# Altium PCB TINY1616_PCB.PcbDoc
Units mil, origin at the board's own origin, x right, y up, seen from the top; angles counter-clockwise.
Board outline 640 x 1130 mil, 2 copper layers (Top Layer, Bottom Layer); 15 components, 24 nets, 74 pads, 7 vias.
Unrouted connection lines stored in the file: 4.
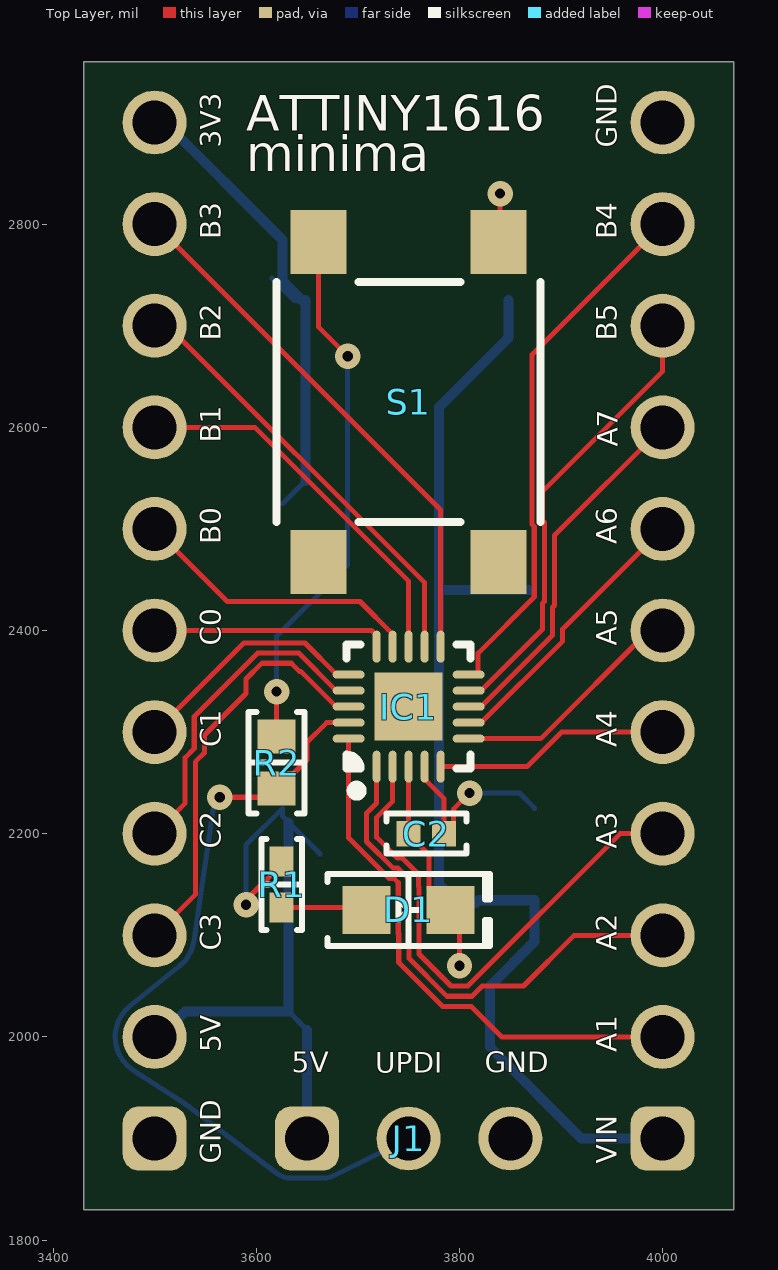
[diagram p0: Top Layer view]
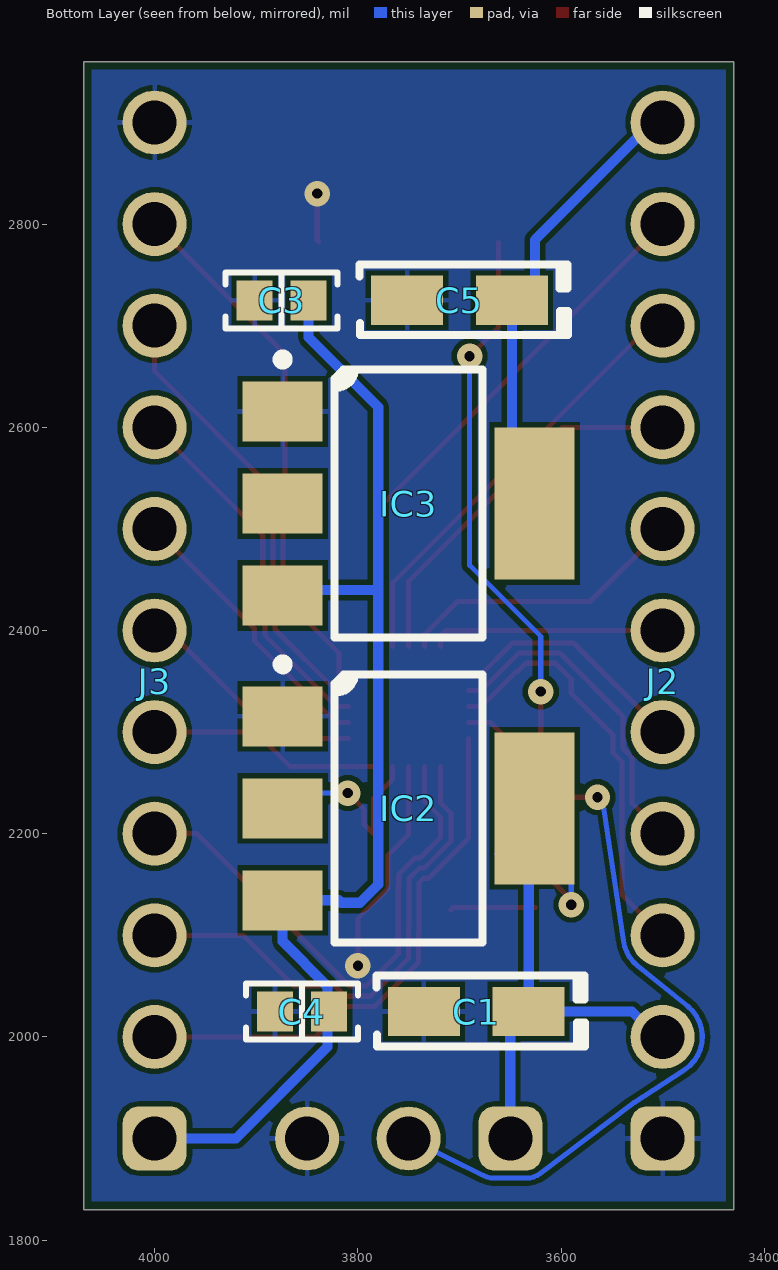
[diagram p1: Bottom Layer view, seen from below]

## Layer stack, top to bottom
Top Solder: solder mask 0.4, Solder Resist, Dk 3.5
Top Layer: signal copper 1.4
Dielectric 1: dielectric 12.6, FR-4, Dk 4.8
Bottom Layer: signal copper 1.4
Bottom Solder: solder mask 0.4, Solder Resist, Dk 3.5

## Board outline
3430,2960 3430,1830 4070,1830 4070,2960

## Design rules (kind name [scope] priority, off if disabled: settings)
BoardOutlineClearance [All] p1: gap=7.87 ignorepadtopadclearanceinfootprint=FALSE
Clearance [All] p1: gap=5 ignorepadtopadclearanceinfootprint=FALSE except(9.84: Arc-Hole Track-Hole SMDPad-Hole THPad-Hole Via-Hole Fill-Hole Poly-Hole Region-Hole Text-Hole)
ComponentClearance [All] p1: gap=5 collisioncheckmode=3 verticalgap=5 showdistances=TRUE
DiffPairsRouting [All] p1: maxlimit=10 minlimit=5 mostfreqgap=5 toplayer_minwidth=5 toplayer_maxwidth=1000 toplayer_prefwidth=5 bottomlayer_minwidth=5 bottomlayer_maxwidth=1000 bottomlayer_prefwidth=5 maxuncoupledlength=500
Height [All] p1: minheight=0 maxheight=71497.94 prefheight=500
HoleSize [All] p1: absolutevalues=TRUE maxlimit=248.03 minlimit=11.81 maxpercent=80.000 minpercent=20.000
HoleToHoleClearance [All] p1: gap=9.84 allowstackedmicrovias=FALSE
MinimumAnnularRing [All] p1: minimumring=3
MinimumSolderMaskSliver [All] p1: minsoldermaskwidth=0
PlaneClearance [All] p1: clearance=5
PlaneConnect PlaneConnectPowerPads [InPadClass('PowerPads')] p1: planeconnectstyle=Direct reliefexpansion=20 reliefentries=4 reliefconductorwidth=10 reliefairgap=10
PlaneConnect [All] p2: pad.planeconnectstyle=Relief pad.reliefexpansion=11.81 pad.reliefentries=4 pad.reliefconductorwidth=5 pad.reliefairgap=5 via.planeconnectstyle=Direct via.reliefexpansion=11.81 via.reliefentries=4 via.reliefconductorwidth=5 via.reliefairgap=5
PolygonConnect PolygonConnectPowerPads [All vs (InPadClass('PowerPads'))] p1: connectstyle=Direct reliefconductorwidth=10 reliefentries=4 polygonreliefangle="90 Angle" airgapwidth=10
PolygonConnect [All] p2: thpad.connectstyle=Relief thpad.reliefconductorwidth=5 thpad.reliefentries=4 thpad.polygonreliefangle="90 Angle" thpad.airgapwidth=5 smdpad.connectstyle=Relief smdpad.reliefconductorwidth=5 smdpad.reliefentries=4 smdpad.polygonreliefangle="90 Angle" smdpad.airgapwidth=5 via.connectstyle=Direct via.reliefconductorwidth=5 via.reliefentries=4 via.polygonreliefangle="90 Angle" via.airgapwidth=5
RoutingVias [All] p1: holewidth=11.81 width=23.62 viastyle="Through Hole" minholewidth=11.81 minwidth=23.62 maxholewidth=23.62 maxwidth=259.84
SilkToSilkClearance [All] p1: silktosilkclearance=0
SilkToSolderMaskClearance [IsPad] p1: minsilkscreentomaskgap=5 clearancetoexposedcopper=TRUE
SolderMaskExpansion [All] p1: expansion=2.95 istentingtop=FALSE
SupplyNets "Schematic Supply Nets" [InNet('GND')] p1: voltage=0.000
Width [All] p1: maxlimit=1000 minlimit=5 preferedwidth=5 minimp=50.000000 maximp=50.000000 favimp=50.000000
20 further rules are at their usual default settings.

## Components (designator, comment, footprint, x,y, rotation, side; value= is the part's Value field where it differs from the comment)
C1 "22 µF" "CAP POL 1206_3216" 3683.43,2025 r0 bottom
C2 "0.022 µF" "CAP 0402_1005" 3767.32,2200 r0 top
C3 "0.1 µF" "CAP 0603_1608" 3875,2725 r180 bottom
C4 "0.1 µF" "CAP 0603_1608" 3855,2025 r180 bottom
C5 "22 µF" "CAP POL 1206_3216" 3700,2725 r0 bottom
D1 "PWR" "LED 0805_2012 GREEN" 3750,2125 r0 top value=Green
IC1 "ATTINY1616-MNR" "MICROCHIP VQFN-20 3X3 REB" 3750,2325 r90 top
IC2 "LD1117S50TR" "ST SOT-223" 3750,2225 r180 bottom
IC3 "LD1117S33TR" "ST SOT-223" 3750,2525 r180 bottom
J1 "UPDI" "WURTH WE-PHD 61300311121" 3750,1900 r0 top
J2 "61301011121" "WURTH WE-PHD 61301011121" 3500,2350 r90 bottom
J3 "61301011121" "WURTH WE-PHD 61301011121" 4000,2350 r90 bottom
R1 "1k" "RES 0402_1005" 3625,2150 r90 top
R2 "180 Ohms" "RES 0603_1608" 3620,2270 r270 top
S1 "B3FS-1012P" "OMRON B3FS-1012P" 3750,2625 r270 top

## Footprints (in the part's own frame and the unit in brackets; to place one, negate y for a bottom-side part, rotate by r counter-clockwise, add the part's x,y. Pads: shape width x height; smd on the part's side, far side on the other; paste and mask are expansions set on the pad)
"CAP 0402_1005" [mm] "Chip Capacitor, 2-Leads, Body 1.02x0.51mm, IPC Medium Density"
  rect 0.6x0.64 smd: 1(-0.44,0) 2(0.44,0)
  silkscreen extent -1,-0.5 1,0.5, body extent -0.5,-0.26 0.5,0.26, height 0.52
"CAP 0603_1608" [mm] "Chip Capacitor, 2-Leads, Body 1.60x0.80mm, IPC Medium Density"
  rect 0.9x1 smd: 1(-0.675,0) 2(0.675,0)
  silkscreen extent -1.4,-0.7 1.4,0.7, body extent -0.8,-0.41 0.8,0.41, height 0.82
"CAP POL 1206_3216" [mm] "Molded Capacitor, 2-Leads, Body 3.20x1.6mm, IPC Medium Density"
  rect 1.8x1.23 smd: 1(-1.31,0) 2(1.31,0)
  silkscreen extent -2.72,-0.9 2.5,0.87, body extent -1.72,-0.85 1.71,0.85, height 1.7
"LED 0805_2012 GREEN" [mm] "Chip Diode, 2-Leads, Body 2.00x1.25mm, IPC Medium Density"
  rect 1.2x1.2 smd: 1(-1.05,0) 2(1.05,0)
  silkscreen extent -2.03,-0.9 2.03,0.9, body extent -1,-0.62 1,0.63, height 0.9
"MICROCHIP VQFN-20 3X3 REB" [mm] "QFN, 20-Leads, Body 3.00x3.00mm, Pitch 0.40mm, Thermal Pad 1.70x1.70mm, IPC Medium Density"
  oval 0.8x0.2 smd: 1(-1.5,0.8) 2(-1.5,0.4) 3(-1.5,0) 4(-1.5,-0.4) 5(-1.5,-0.8) 11(1.5,-0.8) 12(1.5,-0.4) 13(1.5,0) 14(1.5,0.4) 15(1.5,0.8)
  oval 0.2x0.8 smd: 6(-0.8,-1.5) 7(-0.4,-1.5) 8(0,-1.5) 9(0.4,-1.5) 10(0.8,-1.5) 16(0.8,1.5) 17(0.4,1.5) 18(0,1.5) 19(-0.4,1.5) 20(-0.8,1.5)
  rect 1.7x1.7 smd: 21(0,0)
  silkscreen extent -2.22,-1.55 1.55,1.55, body extent -1.5,-1.5 1.5,1.5, height 0.9
"OMRON B3FS-1012P" [mm] "B3FS-1000 Flat Style, 4 Pins, 6.3x6.3x4.3mm, 4.5mm Pitch"
  rect 1.6x1.4 smd: 1(4,-2.25) 2(-4,-2.25) 3(4,2.25) 4(-4,2.25)
  silkscreen extent -3,-3.3 3,3.3, body extent -4,-3.15 4,3.15, height 4.2
"RES 0402_1005" [mm] "Chip Resistor, 2-Leads, Body 1.0x0.5mm, IPC Medium Density"
  rect 0.75x0.6 smd: 1(-0.575,0) 2(0.575,0)
  silkscreen extent -1.14,-0.51 1.14,0.51, body extent -0.5,-0.25 0.5,0.25, height 0.35
"RES 0603_1608" [mm] "Chip Resistor, 2-Leads, Body 1.60x0.80mm, IPC Medium Density"
  rect 0.85x0.95 smd: 1(-0.65,0) 2(0.65,0)
  silkscreen extent -1.27,-0.7 1.27,0.7, body extent -0.8,-0.4 0.8,0.4, height 0.45
"ST SOT-223" [mm] "SOT223, 4-Leads, Body 6.50x7.00mm (avg), Pitch 2.30mm, IPC Medium Density"
  rect 2x1.5 smd: 1(-3.15,2.3) 2(-3.15,0) 3(-3.15,-2.3)
  rect 2x3.8 smd: 4(3.15,0)
  silkscreen extent -3.27,-3.35 1.85,3.72, body extent -3.52,-3.25 3.5,3.25, height 1.8
"WURTH WE-PHD 61300311121" [mm] "Pin Header, pitch 2.54 mm, THT, Vertical, single row, 3p"
  rrect50% 1.6x1.6 hole 1.1: 1(-2.54,0)
  round 1.6 hole 1.1: 2(0,0) 3(2.54,0)
  body extent -3.81,-1.27 3.81,1.27, height 8.57
"WURTH WE-PHD 61301011121" [mm] "Pin Header, pitch 2.54 mm, THT, Vertical, single row, 10p"
  rrect50% 1.6x1.6 hole 1.1: 1(-11.43,0)
  round 1.6 hole 1.1: 2(-8.89,0) 3(-6.35,0) 4(-3.81,0) 5(-1.27,0) 6(1.27,0) 7(3.81,0) 8(6.35,0) 9(8.89,0) 10(11.43,0)
  body extent -12.7,-1.27 12.7,1.27, height 8.57

## Part data
C1 C5: library part 293D105X9016A8T, "293D105X9016A8T", Capacitance="1 µF", Device Package="1206 (3216 Metric)", ESR (Equivalent Series Resistance)="9.3Ohm @ 100kHz", Manufacturer="Vishay Sprague", Manufacturer Size Code=A, Operating Temperature="-55°C ~ 125°C", Supplier Part Number 1=718-293D105X9016A8TCT-ND, Tolerance=±10%, Voltage - Rated="16 V", ComponentLink1Description=Datasheet, ComponentLink1URL=https://www.vishay.com/docs/40002/293d.pdf, ComponentLink2Description="DigiKey Link", ComponentLink2URL=https://www.digikey.com/en/products/detail/vishay-sprague/293D105X9016A8T/21707485, Features="General Purpose", Height - Seated (Max)="0.071\" (1.80mm)", LastUpdated="03.06.2024 19:29:26", Lifecycle Status=Active, Minimum Order=1, Mounting Type="Surface Mount", Package / Case="1206 (3216 Metric)", Packaging=TapeAndReel, Part Number=293D105X9016A8T, PartId=5870, Price=0.18, Series="TANTAMOUNT™, 293D", Size / Dimension="0.126\" L x 0.063\" W (3.20mm x 1.60mm)", Supplier 1=DigiKey, Type=Molded
C2: library part C0402C223K5RECAUTO, "CAP CER 0402 22NF 50V X7R 10%", Device Package="0402 (1005 Metric)", Manufacturer=KEMET, Operating Temperature="-55°C ~ 125°C", Ratings=AEC-Q200, Supplier Part Number 1=399-17166-1-ND, Temperature Coefficient=X7R, Tolerance=±10%, Voltage - Rated=50V, Applications="Automotive, ESD Protection", Capacitance="0.022 µF", ComponentLink1Description=Datasheet, ComponentLink1URL=https://api.kemet.com/component-edge/download/datasheet/C0402C223K5RECAUTO.pdf, ComponentLink2Description="DigiKey Link", ComponentLink2URL=https://www.digikey.com/en/products/detail/kemet/C0402C223K5RECAUTO/8563694, LastUpdated="09.02.2024 20:04:38", Lifecycle Status=Active, Minimum Order=1, Mounting Type="Surface Mount, MLCC", Package / Case="0402 (1005 Metric)", Packaging=TapeAndReel, Part Number=C0402C223K5RECAUTO, Part Status=Active, PartId=1729, Price=0.01, Series="ESD SMD Auto X7R", Size / Dimension="0.039\" L x 0.020\" W (1.00mm x 0.50mm)", Supplier 1=DigiKey, Thickness (Max)="0.022\" (0.55mm)"
C3 C4: library part C0603C104K5RAC7411, "CAP CER 0.1UF 50V X7R 0603", Device Package="0603 (1608 Metric)", Manufacturer=KEMET, Operating Temperature="-55°C ~ 125°C", Supplier Part Number 1=399-C0603C104K5RAC7411CT-ND, Temperature Coefficient=X7R, Tolerance=±10%, Voltage - Rated=50V, Applications="Bypass, Decoupling", Capacitance="0.1 µF", ComponentLink1Description=Datasheet, ComponentLink1URL=https://api.kemet.com/component-edge/download/datasheet/C0603C104K5RAC7411.pdf, ComponentLink2Description="DigiKey Link", ComponentLink2URL=https://www.digikey.com/en/products/detail/kemet/C0603C104K5RAC7411/3317013, LastUpdated="09.02.2024 20:10:30", Lifecycle Status=Active, Minimum Order=1, Mounting Type="Surface Mount, MLCC", Package / Case="0603 (1608 Metric)", Packaging=TapeAndReel, Part Number=C0603C104K5RAC7411, Part Status=Active, PartId=2233, Price=0.01, Series="SMD Comm X7R", Size / Dimension="0.063\" L x 0.031\" W (1.60mm x 0.80mm)", Supplier 1=DigiKey, Thickness (Max)="0.035\" (0.90mm)"
D1: library part QTLP630C4TR, "LED GREEN CLEAR 0805 SMD", Color=Green, Current - Test=20mA, Device Package="0805 (2012 Metric)", Lens Color=Colorless, Manufacturer="Everlight Electronics Co Ltd", Millicandela Rating=10mcd, Supplier Device Package=0805, Supplier Part Number 1=1080-1411-1-ND, Voltage - Forward (Vf) (Typ)=2.1V, ComponentLink1Description=Datasheet, ComponentLink1URL=//media.digikey.com/PDF/Data%20Sheets/Everlight%20PDFs/QTLP630-2.pdf, ComponentLink2Description="DigiKey Link", ComponentLink2URL=https://www.digikey.com/en/products/detail/everlight-electronics-co-ltd/QTLP630C4TR/2675902, Configuration=Standard, Height (Max)=1.20mm, LastUpdated="03.06.2024 20:00:30", Lens Size="1.40mm x 1.25mm", Lens Style="Rectangle with Flat Top", Lens Transparency=Clear, Lifecycle Status=Active, Minimum Order=1, Mounting Type="Surface Mount", Package / Case="0805 (2012 Metric)", Packaging=TapeAndReel, Part Number=QTLP630C4TR, Part Status=Active, PartId=240, Price=0.05, Series=-, Size / Dimension="2.00mm L x 1.25mm W", Supplier 1=DigiKey, Viewing Angle=140°, Wavelength - Dominant=570nm, Wavelength - Peak=565nm
IC1: "IC MCU 8BIT 16KB FLASH 20VQFN", Manufacturer="Microchip Technology", Operating Temperature="-40°C ~ 105°C (TA)", Package / Case="20-VFQFN Exposed Pad", Supplier Device Package="20-VQFN (3x3)", Supplier Part Number 1=ATTINY1616-MNRCT-ND, Voltage - Supply (Vcc/Vdd)="1.8V ~ 5.5V", ComponentLink1Description=Datasheet, ComponentLink1URL=http://www.microchip.com/mymicrochip/filehandler.aspx?ddocname=en606269, ComponentLink2Description="DigiKey Link", ComponentLink2URL=https://www.digikey.com/en/products/detail/microchip-technology/ATTINY1616-MNR/7354618, Connectivity="I²C, IrDA, LINbus, SPI, UART/USART", Core Processor=AVR, Core Size=8-Bit, Data Converters="A/D 20x10b; D/A 3x8b", EEPROM Size="256 x 8", LastUpdated="30.10.2023 22:45:22", Lifecycle Status=Active, Minimum Order=1, Mounting Type="Surface Mount", Number of I/O=18, Oscillator Type=Internal, Packaging=TapeAndReel, Part Number=ATTINY1616-MNR, Part Status=Active, PartId=283, Peripherals="Brown-out Detect/Reset, POR, PWM, WDT", Price=0.79, Program Memory Size="16KB (16K x 8)", Program Memory Type=FLASH, RAM Size="2K x 8", Series="tinyAVR™ 1, Functional Safety (FuSa)", Speed=20MHz, Supplier 1=DigiKey
IC2: "IC REG LINEAR 5V 800MA SOT223", Current - Output=800mA, Current - Quiescent (Iq)="10 mA", Manufacturer=STMicroelectronics, Operating Temperature="0°C ~ 125°C", Package / Case="TO-261-4, TO-261AA", Supplier Device Package=SOT-223, Supplier Part Number 1=497-6447-1-ND, Voltage - Input (Max)=15V, Voltage - Output (Min/Fixed)=5V, Voltage Dropout (Max)="1.2V @ 800mA", ComponentLink1Description=Datasheet, ComponentLink1URL=http://www.st.com/content/ccc/resource/technical/document/datasheet/99/3b/7d/91/91/51/4b/be/CD00000544.pdf/files/CD00000544.pdf/jcr:content/translations/en.CD00000544.pdf, ComponentLink2Description="DigiKey Link", ComponentLink2URL=https://www.digikey.com/en/products/detail/stmicroelectronics/LD1117S50TR/1038360, LastUpdated="03.06.2024 20:14:20", Lifecycle Status=Active, Minimum Order=1, Mounting Type="Surface Mount", Number of Regulators=1, Output Configuration=Positive, Output Type=Fixed, Packaging=TapeAndReel, Part Number=LD1117S50TR, Part Status=Active, Price=0.13, Protection Features="Over Current, Over Temperature", PSRR="75dB (120Hz)", Series=-, Supplier 1=DigiKey
IC3: "IC REG LINEAR 3.3V 800MA SOT223", Current - Output=800mA, Current - Quiescent (Iq)="10 mA", Manufacturer=STMicroelectronics, Operating Temperature="0°C ~ 125°C", Package / Case="TO-261-4, TO-261AA", Supplier Device Package=SOT-223, Supplier Part Number 1=497-1242-1-ND, Voltage - Input (Max)=15V, Voltage - Output (Min/Fixed)=3.3V, Voltage Dropout (Max)="1.2V @ 800mA", ComponentLink1Description=Datasheet, ComponentLink1URL=http://www.st.com/content/ccc/resource/technical/document/datasheet/99/3b/7d/91/91/51/4b/be/CD00000544.pdf/files/CD00000544.pdf/jcr:content/translations/en.CD00000544.pdf, ComponentLink2Description="DigiKey Link", ComponentLink2URL=https://www.digikey.com/en/products/detail/stmicroelectronics/LD1117S33TR/585766, LastUpdated="03.06.2024 20:14:20", Lifecycle Status=Active, Minimum Order=1, Mounting Type="Surface Mount", Number of Regulators=1, Output Configuration=Positive, Output Type=Fixed, Packaging=TapeAndReel, Part Number=LD1117S33TR, Part Status=Active, Price=0.13, Protection Features="Over Current, Over Temperature", PSRR="75dB (120Hz)", Series=-, Supplier 1=DigiKey
J1: library part 61300311121, "CONN HEADER VERT 3POS 2.54MM", Current Rating (Amps)=3A, Insulation Color=Black, Manufacturer="Würth Elektronik", Material Flammability Rating="UL94 V-0", Operating Temperature="-40°C ~ 105°C", Supplier Part Number 1=732-5316-ND, ComponentLink1Description=Datasheet, ComponentLink1URL=https://katalog.we-online.de/em/datasheet/6130xx11121.pdf, ComponentLink2Description="DigiKey Link", ComponentLink2URL=https://www.digikey.com/en/products/detail/würth-elektronik/61300311121/4846825, Connector Type=Header, Contact Finish - Mating=Gold, Contact Length - Mating="0.236\" (6.00mm)", Contact Length - Post="0.118\" (3.00mm)", Contact Material="Copper Alloy", Contact Shape=Square, Contact Type="Male Pin", Fastening Type=Push-Pull, Insulation Height="0.100\" (2.54mm)", Insulation Material="Polyamide (PA6T), Nylon 6T", LastUpdated="18.10.2024 13:43:15", Lifecycle Status=Active, Minimum Order=1, Mounting Type="Through Hole", Number of Positions=3, Number of Positions Loaded=All, Number of Rows=1, Overall Contact Length="0.454\" (11.54mm)", Packaging=Bulk, Part Number=61300311121, Part Status=Active, PartId=189, Pitch - Mating="0.100\" (2.54mm)", Price=0.07, Row Spacing - Mating="-40°C ~ 105°C", Series=WR-PHD, Shrouding=Unshrouded, Style="Board to Board or Cable", Supplier 1=DigiKey, Termination=Solder
J2 J3: "CONN HEADER VERT 10POS 2.54MM", Current Rating (Amps)=3A, Insulation Color=Black, Manufacturer="Würth Elektronik", Material Flammability Rating="UL94 V-0", Operating Temperature="-40°C ~ 105°C", Supplier Part Number 1=732-2670-ND, ComponentLink1Description=Datasheet, ComponentLink1URL=https://katalog.we-online.de/em/datasheet/6130xx11121.pdf, ComponentLink2Description="DigiKey Link", ComponentLink2URL=https://www.digikey.com/en/products/detail/würth-elektronik/61301011121/2508439, Connector Type=Header, Contact Finish - Mating=Gold, Contact Length - Mating="0.236\" (6.00mm)", Contact Length - Post="0.118\" (3.00mm)", Contact Material="Copper Alloy", Contact Shape=Square, Contact Type="Male Pin", Fastening Type=Push-Pull, Insulation Height="0.100\" (2.54mm)", Insulation Material="Polyamide (PA6T), Nylon 6T", LastUpdated="18.10.2024 13:42:05", Lifecycle Status=Active, Minimum Order=1, Mounting Type="Through Hole", Number of Positions=10, Number of Positions Loaded=All, Number of Rows=1, Overall Contact Length="0.454\" (11.54mm)", Packaging=Bulk, Part Number=61301011121, Part Status=Active, PartId=188, Pitch - Mating="0.100\" (2.54mm)", Price=0.70, Row Spacing - Mating="-40°C ~ 105°C", Series=WR-PHD, Shrouding=Unshrouded, Style="Board to Board or Cable", Supplier 1=DigiKey, Termination=Solder
R1: library part RCA04021K00FKEDHP, "RES 1K OHM 1% 1/5W 0402", Device Package="0402 (1005 Metric)", Manufacturer="Vishay Dale", Operating Temperature="-55°C ~ 155°C", Power (Watts)="0.2W, 1/5W", Ratings=AEC-Q200, Resistance="1 kOhms", Supplier Device Package=0402, Supplier Part Number 1=541-3240-1-ND, Temperature Coefficient=±100ppm/°C, Tolerance=±1%, ComponentLink1Description=Datasheet, ComponentLink1URL=http://www.vishay.com/docs/20067/rcahp.pdf, ComponentLink2Description="DigiKey Link", ComponentLink2URL=https://www.digikey.com/en/products/detail/vishay-dale/RCA04021K00FKEDHP/6561237, Composition="Thick Film", Features="Anti-Sulfur, Automotive AEC-Q200, Pulse Withstanding", Height - Seated (Max)="0.016\" (0.40mm)", LastUpdated="09.02.2024 20:30:21", Lifecycle Status=Active, Minimum Order=1, Number of Terminations=2, Package / Case="0402 (1005 Metric)", Packaging=TapeAndReel, Part Number=RCA04021K00FKEDHP, Part Status=Active, PartId=3119, Price=0.02, Series=RCA-HP, Size / Dimension="0.039\" L x 0.020\" W (1.00mm x 0.50mm)", Supplier 1=DigiKey
R2: library part CRCW0603180RJNEA, "RES SMD 180 OHM 5% 1/10W 0603", Device Package="0603 (1608 Metric)", Manufacturer="Vishay Dale", Operating Temperature="-55°C ~ 155°C", Power (Watts)="0.1W, 1/10W", Ratings=AEC-Q200, Supplier Device Package=0603, Supplier Part Number 1=541-180GCT-ND, Temperature Coefficient=±200ppm/°C, Tolerance=±5%, ComponentLink1Description=Datasheet, ComponentLink1URL=http://www.vishay.com/docs/20035/dcrcwe3.pdf, ComponentLink2Description="DigiKey Link", ComponentLink2URL=https://www.digikey.com/en/products/detail/vishay-dale/CRCW0603180RJNEA/1174211, Composition="Thick Film", Features="Automotive AEC-Q200", Height - Seated (Max)="0.020\" (0.50mm)", LastUpdated="09.02.2024 20:43:36", Lifecycle Status=Active, Minimum Order=1, Number of Terminations=2, Package / Case="0603 (1608 Metric)", Packaging=TapeAndReel, Part Number=CRCW0603180RJNEA, Part Status=Active, PartId=5152, Price=0.01, Resistance="180 Ohms", Series=CRCW, Size / Dimension="0.063\" L x 0.033\" W (1.60mm x 0.85mm)", Supplier 1=DigiKey
S1: "SWITCH TACTILE SPST-NO 0.05A 24V", Contact Rating @ Voltage="0.05A @ 24VDC", Manufacturer="Omron Electronics Inc-EMC Div", Operating Force=150gf, Operating Temperature="-25°C ~ 70°C", Supplier Part Number 1=SW1237CT-ND, Actuator Height off PCB, Vertical=4.30mm, Actuator Orientation="Top Actuated", Actuator Type=Standard, Circuit=SPST-NO, ComponentLink1Description=Datasheet, ComponentLink1URL=https://omronfs.omron.com/en_US/ecb/products/pdf/en-b3fs.pdf, ComponentLink2Description="DigiKey Link", ComponentLink2URL=http://digikey.com/product-detail/en/omron-electronics-inc-emc-div/B3FS-1012P/SW1237CT-ND/2747253, Illumination=Non-Illuminated, LastUpdated="30.03.2020 15:12:46", Lifecycle Status=Active, Minimum Order=1, Mounting Type="Surface Mount", Outline="6.30mm x 6.00mm", Packaging=TapeAndReel, Part Number=B3FS-1012P, Part Status=Active, Price=0.35, Series=B3FS, Supplier 1=DigiKey, Switch Function=Off-Mom, Termination Style="Gull Wing"

## Free pads (board coordinates)
  round 62.99 hole 43.31: 2(3500,2900) 2(4000,2900)

## Via types
v1: diameter 25, hole 10, Top Layer to Bottom Layer, tented both sides, 7 vias

## Nets (pads, with @x,y where several pads share a name; then routed paths per layer and width w, separated by ;. In a path a pad name is that pad's centre, name@x,y a point inside that pad or via, vN(x,y) a via of type N, cw(c..) or ccw(c..) an arc to the next point about the centre after c; other vN are vias at no path point)
3v3: C5.1 IC3.2 IC3.4 pad.2@3500,2900 | length 495.7
  Bottom Layer w5: C5.1@3615.49,2746.71 3637.2,2725 C5.1 ; IC3.4 IC3.4@3648.43,2547.44
  Bottom Layer w10: pad.2@3500,2900 3510.2,2900 3625.69,2784.51 3625.69,2744.21 3644.9,2725 C5.1 IC3.4@3648.43,2547.44
GND: C1.2 C2.1 C3.1 C4.1 C5.2 D1.2 IC1.3 IC2.1 IC3.1 J1.3 J2.1 pad.2@4000,2900 S1.3 S1.4 | length 264.8
  Top Layer w5: IC1.3 3750,2199.21 3770.22,2179 3770.22,2146.12 3800,2116.34 v1(3800,2070) ; S1.4 3840,2783.89 v1(3840,2830)
NetD1_1: D1.1 R1.1 | length 84.6
  Top Layer w5: R1.1 3706.3,2127.36 D1.1
NetR2_1: R2.1 S1.1 S1.2 | length 527.7
  Top Layer w5: R2.1 v1(3620,2339.82) ; S1.2 3661.42,2698.58 v1(3690,2670)
  Bottom Layer w5: v1(3620,2339.82) 3620,2394.24 3690,2464.24 v1(3690,2670)
PA0: IC1.19 J1.2 R2.2 | length 795.6
  Top Layer w5: v1(3564.14,2235.86) 3611.45,2235.86 R2.2 3621.97,2244.41 3650,2272.44 3650,2290 3669.25,2309.25 IC1.19
  Bottom Layer w5: v1(3564.14,2235.86) 3560.18,2235.86 3559.49,2236.54 3538.58,2094.33 cw(c3500,2100) 3524.44,2069.62 3475.59,2030.41 ccw(c3500,2000) 3478.85,1967.24 3528.36,1935.28 cw(c3515.75,1915.75) 3529.79,1934.27 3620.21,1865.73 ccw(c3634.25,1884.25) 3634.25,1861 3665.75,1861 ccw(c3665.75,1884.25) 3676.06,1863.41 J1.2
PA1: IC1.20 J3.2 | length 533.6
  Top Layer w5: IC1.20 3690.94,2195.76 3730.58,2156.12 3735.39,2156.12 3739.78,2151.73 3739.78,2134.13 3739.78,2101.93 3740.22,2101.5 3740.22,2073.22 3783.43,2030 3811.72,2030 3841.72,2000 J3.2
PA2: IC1.1 J3.3 | length 502.9
  Top Layer w5: IC1.1 3718.5,2230.21 3708.5,2220.21 3708.5,2192.34 3734.72,2166.12 3739.53,2166.12 3749.78,2155.87 3749.78,2108.7 3750.22,2108.27 3750.22,2077.36 3787.57,2040 3812.43,2040 3822.43,2050 3863.01,2050 3913.01,2100 J3.3
PA3: IC1.2 J3.4 | length 526
  Top Layer w5: IC1.2 3734.25,2231.82 3718.5,2216.07 3718.5,2196.48 3738.86,2176.12 3743.67,2176.12 3759.78,2160.01 3759.78,2147.84 3760.22,2147.4 3760.22,2081.5 3791.72,2050 3808.28,2050 3958.28,2200 J3.4
PA4: IC1.5 J3.5 | length 232.6
  Top Layer w5: IC1.5 3866.54,2265.94 3900.59,2300 J3.5
PA5: IC1.6 J3.6 | length 235.1
  Top Layer w5: IC1.6 3879.95,2293.5 3986.45,2400 J3.6
PA6: IC1.7 J3.7 | length 277
  Top Layer w5: IC1.7 3821.29,2309.25 3901.54,2389.5 3901.54,2401.54 J3.7
PA7: IC1.8 J3.8 | length 361.3
  Top Layer w5: IC1.8 3821.29,2325 3891.54,2395.25 3891.54,2422.53 3893.64,2424.63 3893.64,2493.64 J3.8
PB0: IC1.14 J2.7 | length 289.4
  Top Layer w5: J2.7 3571.48,2428.52 3702.02,2428.52 3734.25,2396.29 IC1.14
PB1: IC1.13 J2.8 | length 377.3
  Top Layer w5: J2.8 3598.6,2600 3750,2448.6 IC1.13
PB2: IC1.12 J2.9 | length 433.5
  Top Layer w5: J2.9 3512.74,2700 3765.75,2446.99 IC1.12
PB3: IC1.11 J2.10 | length 532.5
  Top Layer w5: J2.10 3781.5,2518.5 IC1.11
PB4: IC1.10 J3.10 | length 529
  Top Layer w5: IC1.10 3817.04,2356.5 3818.37,2357.82 3818.37,2377.64 3873.64,2432.92 3873.64,2502.12 3871.54,2504.23 3871.54,2671.54 J3.10
PB5: IC1.9 J3.9 | length 447.3
  Top Layer w5: IC1.9 3821.29,2340.75 3881.54,2400.99 3881.54,2426.67 3883.64,2428.77 3883.64,2506.26 3881.54,2508.37 3881.54,2536.69 4000,2655.15 J3.9
PC0: IC1.15 J2.6 | length 231.6
  Top Layer w5: J2.6 3713.59,2400 3718.5,2395.09 IC1.15
PC1: IC1.16 J2.5 | length 240.2
  Top Layer w5: J2.5 3587.75,2387.75 3647.88,2387.75 3679.13,2356.5 IC1.16
PC2: IC1.17 J2.4 | length 324.6
  Top Layer w5: J2.4 3530,2230 3530,2274.85 3539,2283.85 3539,2315.39 3601.36,2377.75 3641.7,2377.75 3678.71,2340.75 IC1.17
PC3: IC1.18 J2.3 | length 414.6
  Top Layer w5: J2.3 3540,2140 3540,2270.71 3549,2279.71 3549,2297.1 3590,2338.11 3590,2352.25 3605.5,2367.75 3634.5,2367.75 3642.43,2359.82 3643.88,2359.82 3678.71,2325 IC1.18
VDD: C1.1 C2.2 IC1.4 IC2.2 IC2.4 J1.1 J2.2 R1.2 | length 882.5
  Top Layer w5: v1(3590,2130) 3590,2134.68 3625,2169.68 R1.2 ; IC1.4 3765.75,2253.71 3784.65,2234.81 C2.2 3793.96,2209.31 3793.96,2223.96 v1(3810,2240)
  Bottom Layer w5: J2.2 J2.2@3505.15,2000 ; v1(3590,2130) 3590,2189.02 IC2.4 3625.98,2216.87 3631.85,2211 IC2.4@3662.85,2180 ; C1.1 C1.1@3650,2006.85 ; v1(3810,2240) 3859.02,2240 IC2.2
  Bottom Layer w10: J2.2@3505.15,2000 3530.15,2025 C1.1 IC2.4@3631.85,2211 ; J1.1 C1.1@3650,2006.85
VIN: C3.2 C4.2 IC2.3 IC3.3 J3.1 | length 1174.6
  Bottom Layer w5: 3780,2442.93 3782.93,2440 ; C4.2@3830,2023.43 C4.2 C4.2@3830,2026.57 ; IC3.3@3868.46,2440 IC3.3
  Bottom Layer w10: 3782.93,2440 IC3.3@3868.46,2440 ; C4.2@3830,2023.43 3830,1990 3920,1900 J3.1 ; C4.2@3830,2026.57 3830,2050 3874.02,2094.02 IC2.3 3818.73,2134.45 3816.35,2132.07 3797.93,2132.07 3780,2150 3780,2442.93 3780,2620 3848.43,2688.43 C3.2
pads on no net: IC1.21

## Polygon pours and split planes (outlines as drawn)
GND on Bottom Layer "GND_L02_P000" (solid, pour order 0): 3430,2960 4070,2960 4070,1830 3430,1830

## Silkscreen, mask and mechanical layers (free items; w line width, h text height)
Top Overlay:
  text "ATTINY1616" at 3590,2880 h60
  text "3V3" at 3565,2875 h20 r90
  text "GND" at 3955,2875 h20 r90
  text "minima" at 3590,2840 h60
  text "B3" at 3565,2785 h20 r90
  text "B4" at 3955,2785 h20 r90
  text "B2" at 3565,2685 h20 r90
  text "B5" at 3955,2685 h20 r90
  text "B1" at 3565,2585 h20 r90
  text "A7" at 3955.77,2580.92 h20 r90
  text "B0" at 3565,2485 h20 r90
  text "A6" at 3955,2485 h20 r90
  text "C0" at 3565,2385 h20 r90
  text "A5" at 3955,2385 h20 r90
  text "C1" at 3565,2285 h20 r90
  text "A4" at 3955,2285 h20 r90
  text "C2" at 3565,2185 h20 r90
  text "A3" at 3955,2185 h20 r90
  text "C3" at 3565,2085 h20 r90
  text "A2" at 3955,2085 h20 r90
  text "5V" at 3565,1985 h20 r90
  text "A1" at 3955,1985 h20 r90
  text "5V" at 3635,1965 h20
  text "UPDI" at 3717.16,1964.57 h20
  text "GND" at 3825,1965 h20
  text "GND" at 3565,1875 h20 r90
  text "VIN" at 3955,1875 h20 r90